# Altium PCB SelfBalancingRB.PcbDoc
Units mm, origin at the board's own origin, x right, y up, seen from the top; angles counter-clockwise.
Board outline 65.15 x 51.69 mm, 2 copper layers (Top Layer, Bottom Layer); 35 components, 29 nets, 158 pads, 28 vias.
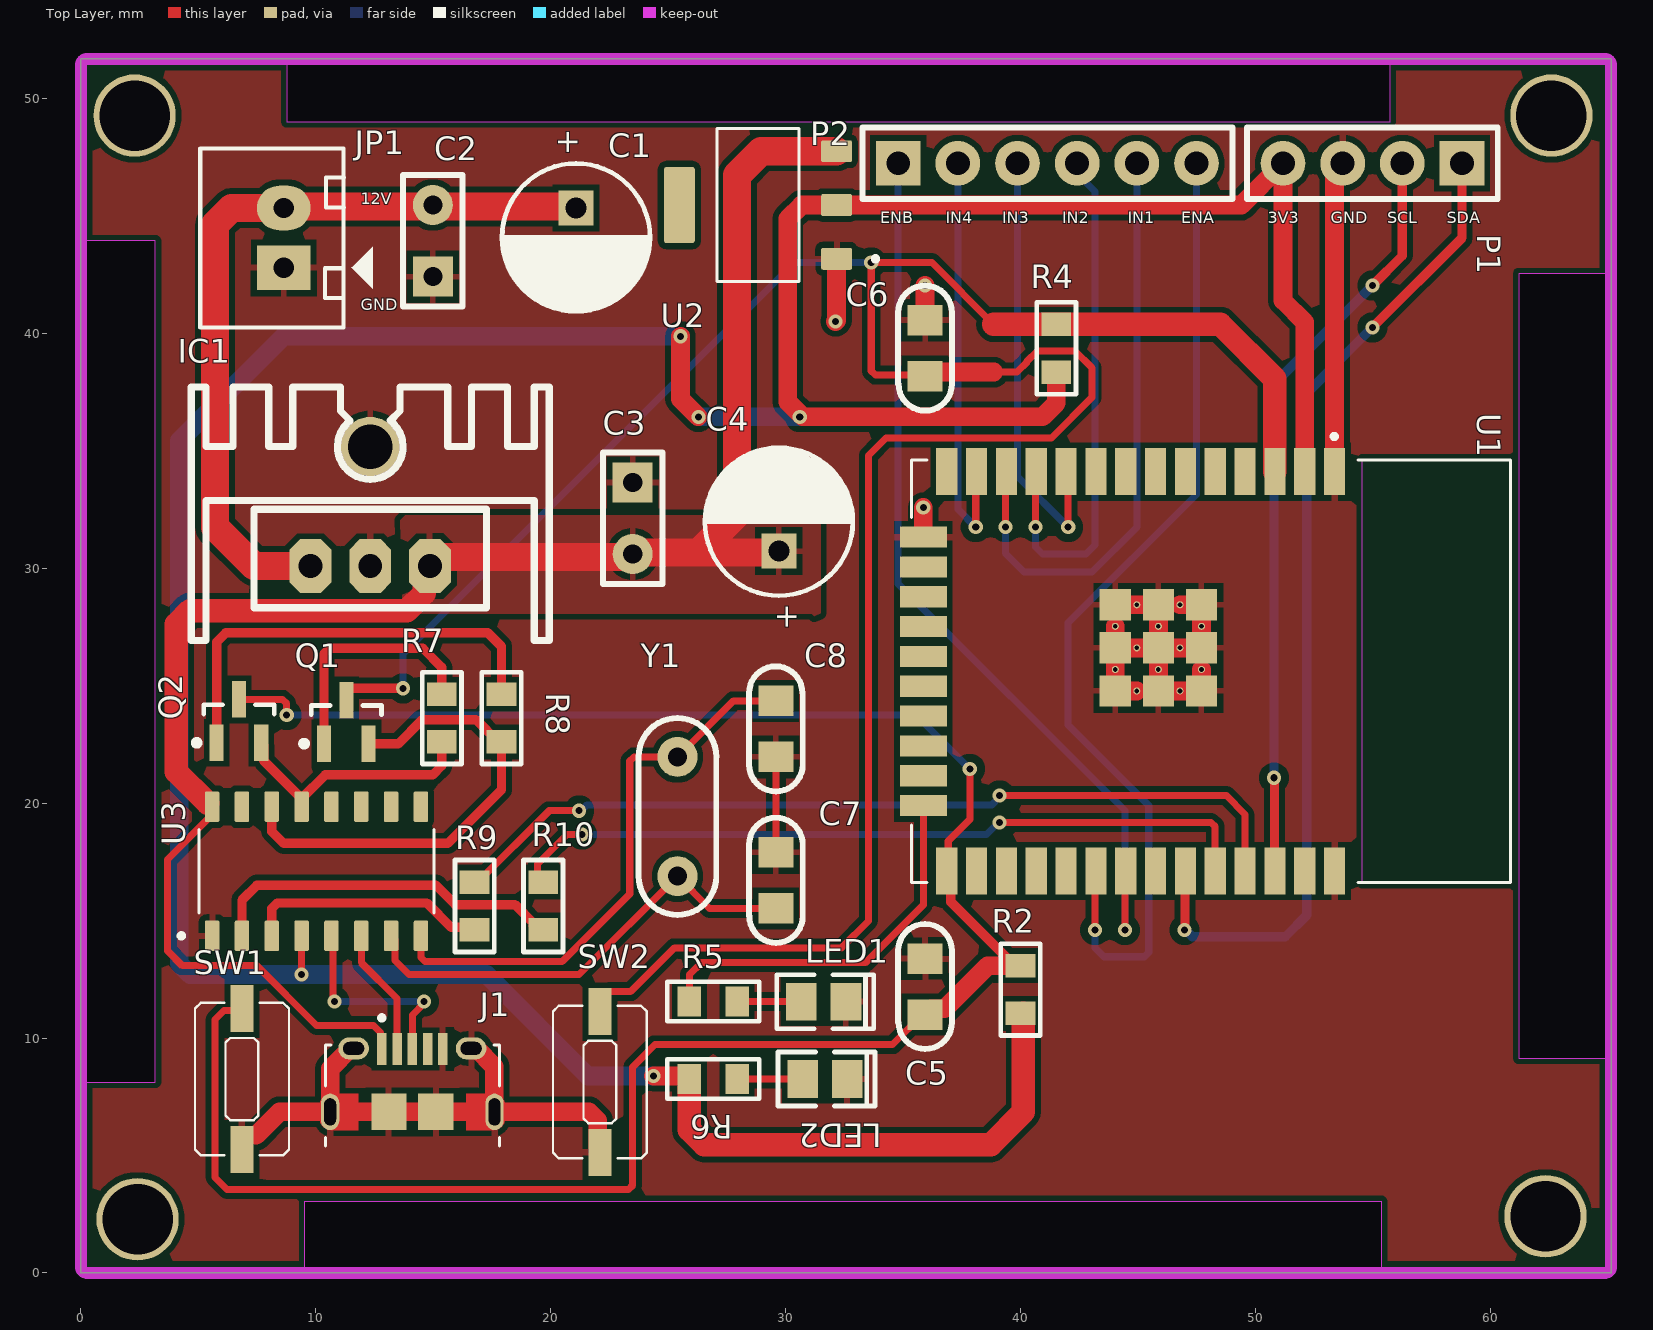
[diagram p0: Top Layer view]
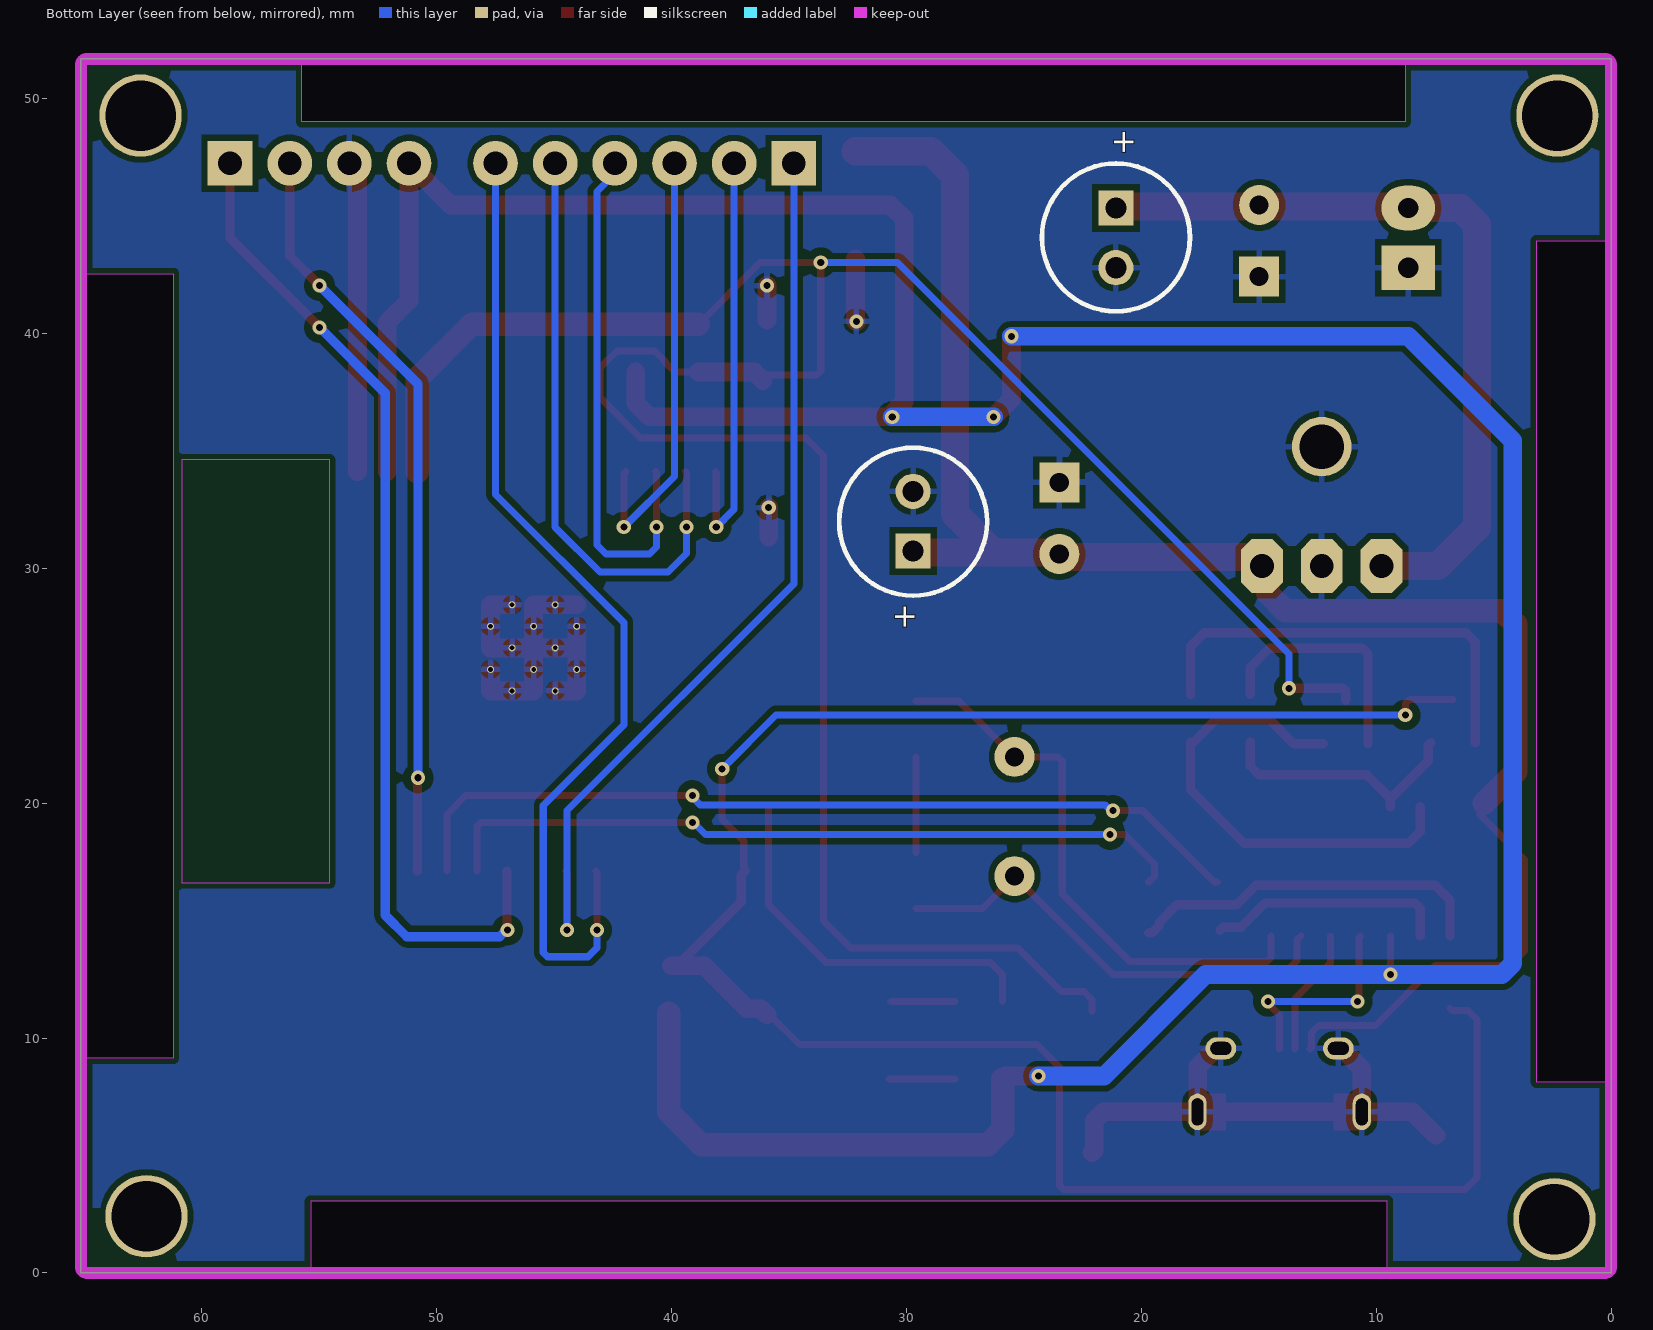
[diagram p1: Bottom Layer view, seen from below]
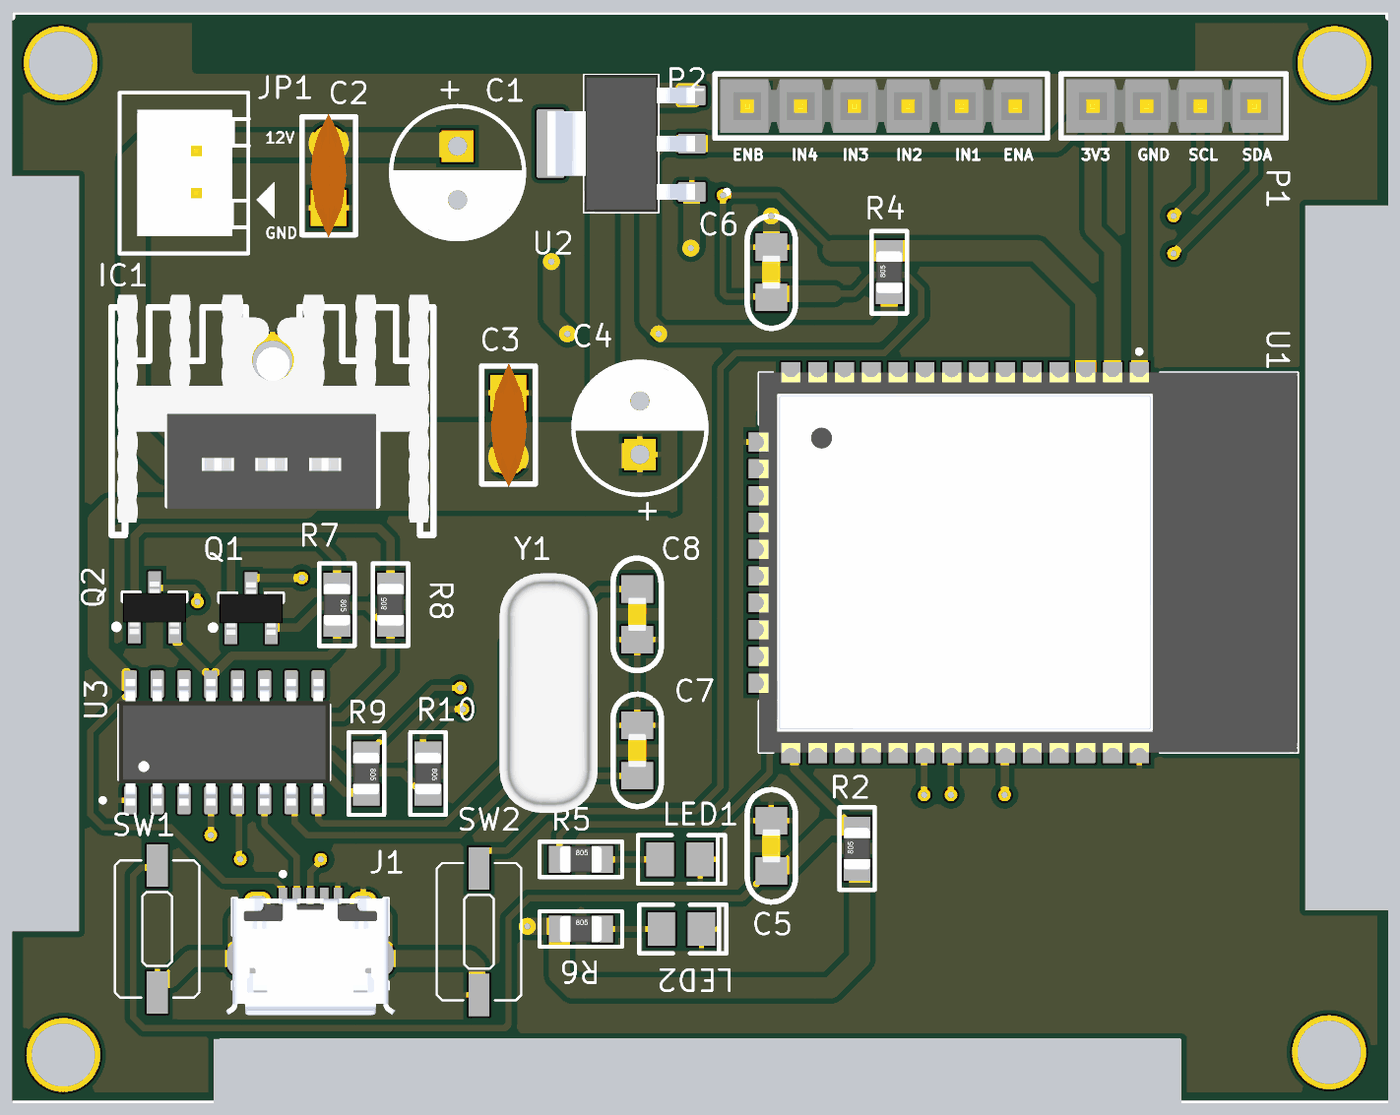
[diagram p2: 3D render of the assembled board from above, using the file's embedded part models]

## Layer stack, top to bottom
Top Solder: solder mask 0.0102, Solder Resist, Dk 3.5
Top Layer: signal copper 0.0356
Dielectric 1: dielectric 0.32, FR-4, Dk 4.8
Bottom Layer: signal copper 0.0356
Bottom Solder: solder mask 0.0102, Solder Resist, Dk 3.5

## Board outline
0,0 0,51.689 65.151,51.689 65.151,0
cut-out: 9.525,3.048 55.372,3.048 55.372,0 9.525,0
cut-out: 0,8.128 3.175,8.128 3.175,43.942 0,43.942
cut-out: 55.753,49.022 55.753,51.689 8.763,51.689 8.763,49.022
cut-out: 61.214,42.545 61.214,9.144 65.151,9.144 65.151,42.545

## Design rules (kind name [scope] priority, off if disabled: settings)
Clearance [All] p1: gap=0.254 ignorepadtopadclearanceinfootprint=TRUE except(0.5: Arc-Hole Track-Hole SMDPad-Hole THPad-Hole Via-Hole Fill-Hole Poly-Hole Region-Hole Text-Hole)
HoleSize [All] p1: absolutevalues=TRUE maxlimit=3 minlimit=0.025 maxpercent=80.000 minpercent=20.000
PolygonConnect [All] p1: connectstyle=Relief reliefconductorwidth=0.254 reliefentries=4 polygonreliefangle="90 Angle" airgapwidth=0.254
RoutingVias [All] p1: holewidth=0.3 width=0.6 viastyle="Through Hole" minholewidth=0.3 minwidth=0.6 maxholewidth=0.6 maxwidth=3
SolderMaskExpansion [All] p1: expansion=0.102 istentingtop=FALSE
Width [All] p1: maxlimit=1.5 minlimit=0.3 preferedwidth=1 toplayer_maxwidth=1.2 bottomlayer_prefwidth=0.8 minimp=50.000000 maximp=50.000000 favimp=50.000000
29 further rules are at their usual default settings.

## Components (designator, comment, footprint, x,y, rotation, side; value= is the part's Value field where it differs from the comment)
C1 "Cap Pol" "RADIAL D" 21.082,45.339 r270 top value=100uF
C2 "Cap Non-pol" "Cap Non-Pol 3mm" 14.986,43.942 r90 top value=100uF
C3 "Cap Non-pol" "Cap Non-Pol 3mm" 23.495,32.131 r270 top value=100uF
C4 "Cap Pol" "RADIAL D" 29.718,30.734 r90 top value=100uF
C5 "Cap Non-pol" C-NP-0805 35.941,12.192 r270 top value=10uF
C6 "Cap Non-pol" C-NP-0805 35.941,39.37 r270 top value=10uF
C7 "Cap Non-pol" C-NP-0805 29.591,16.713 r270 top value=22pF
C8 "Cap Non-pol" C-NP-0805 29.591,23.165 r90 top value=22pF
H? "Hole" "LO KHOAN 3MM" 2.413,2.286 r0 top
H? "Hole" "LO KHOAN 3MM" 62.357,2.413 r0 top
H? "Hole" "LO KHOAN 3MM" 2.286,49.276 r0 top
H? "Hole" "LO KHOAN 3MM" 62.611,49.276 r0 top
IC1 "LM7805" QTO-220H3 9.779,30.099 r0 top
J1 "Micro-USB" AMPHENOL_10118194-0001LF 14.113,6.858 r0 top
JP1 "INPUT" CON2 8.636,42.799 r90 top value="Connector 2"
LED1 "" LED.SMD.RED 31.623,11.557 r180 top
LED2 "" LED.SMD.RED 31.682,8.261 r180 top
P1 "MPU6050" "Header 4" 58.801,47.244 r180 top
P2 "L298_Module" "Header 6" 34.798,47.244 r0 top
Q1 "C1815" SOT23N 11.303,23.459 r90 top
Q2 "C1815" SOT23N 6.731,23.495 r90 top
R2 "RES_SMD_0805" "DIEN TRO 0805" 40.005,12.065 r270 top value=10k-0805
R4 "RES_SMD_0805" "DIEN TRO 0805" 41.529,39.37 r270 top value=10k
R5 "RES_SMD_0805" "DIEN TRO 0805" 26.924,11.557 r180 top value=470
R6 "RES_SMD_0805" "DIEN TRO 0805" 26.924,8.255 r180 top value=470
R7 "RES_SMD_0805" "DIEN TRO 0805" 15.367,23.622 r90 top value=10k
R8 "RES_SMD_0805" "DIEN TRO 0805" 17.907,23.622 r270 top value=10k
R9 "RES_SMD_0805" "DIEN TRO 0805" 16.764,15.621 r90 top value=1k
R10 "RES_SMD_0805" "DIEN TRO 0805" 19.685,15.621 r90 top value=1k
SW1 "PTS635" TactSwitches.PTS635.SMT 6.858,8.255 r90 top
SW2 "PTS635" TactSwitches.PTS635.SMT 22.098,8.128 r90 top
U1 "ESP32-WROOM-32" MODULE_ESP32-WROOM-32 48.115,25.613 r270 top
U2 "AMS1117-3.3" SOT229P700X180-4N 28.829,45.466 r180 top
U3 "CH340G" SOIC127P600X180-16N 10.033,17.101 r90 top
Y1 "XTAL" XTAL 25.4,19.431 r0 top

## Footprints (in the part's own frame and the unit in brackets; to place one, negate y for a bottom-side part, rotate by r counter-clockwise, add the part's x,y. Pads: shape width x height; smd on the part's side, far side on the other; paste and mask are expansions set on the pad)
AMPHENOL_10118194-0001LF [mm]
  rect 0.4x1.35 smd: 1(-1.3,2.675) 2(-0.65,2.675) 3(0,2.675) 4(0.65,2.675) 5(1.3,2.675)
  oval 0.775x1.55 hole 0.5 slot 1.15 at 90 deg mask+0: SH1(-3.5,0) SH4(3.5,0)
  rect 1.5x1.55 smd: SH2(1,0) SH3(-1,0)
  oval 1.3x0.95 hole 0.55 slot 0.9 at 0 deg: SH5(-2.5,2.7) SH6(2.5,2.7)
  Top Layer region: -2.3,-0.775 -3.445,-0.775 -3.471,-0.774 -3.497,-0.772 -3.523,-0.769 -3.549,-0.764 -3.574,-0.758 -3.6,-0.751 -3.624,-0.742 -3.648,-0.732 -3.672,-0.721 -3.695,-0.708 -3.717,-0.694 -3.739,-0.68 -3.76,-0.664 -3.78,-0.647 -3.799,-0.629 -3.817,-0.61 -3.834,-0.59 -3.85,-0.569 -3.864,-0.547 -3.878,-0.525 -3.891,-0.502 -3.902,-0.478 -3.912,-0.454 -3.921,-0.43 -3.928,-0.404 -3.934,-0.379 -3.939,-0.353 -3.942,-0.327 -3.944,-0.301 -3.945,-0.275 -3.945,0.275 -3.944,0.301 -3.942,0.327 -3.939,0.353 -3.934,0.379 -3.928,0.404 -3.921,0.43 -3.912,0.454 -3.902,0.478 -3.891,0.502 -3.878,0.525 -3.864,0.547 -3.85,0.569 -3.834,0.59 -3.817,0.61 -3.799,0.629 -3.78,0.647 -3.76,0.664 -3.739,0.68 -3.717,0.694 -3.695,0.708 -3.672,0.721 -3.648,0.732 -3.624,0.742 -3.6,0.751 -3.574,0.758 -3.549,0.764 -3.523,0.769 -3.497,0.772 -3.471,0.774 -3.445,0.775 -2.3,0.775
  Top Layer region: 3.471,0.774 3.497,0.772 3.523,0.769 3.549,0.764 3.574,0.758 3.6,0.751 3.624,0.742 3.648,0.732 3.672,0.721 3.695,0.708 3.717,0.694 3.739,0.68 3.76,0.664 3.78,0.647 3.799,0.629 3.817,0.61 3.834,0.59 3.85,0.569 3.864,0.547 3.878,0.525 3.891,0.502 3.902,0.478 3.912,0.454 3.921,0.43 3.928,0.404 3.934,0.379 3.939,0.353 3.942,0.327 3.944,0.301 3.945,0.275 3.945,-0.275 3.944,-0.301 3.942,-0.327 3.939,-0.353 3.934,-0.379 3.928,-0.404 3.921,-0.43 3.912,-0.454 3.902,-0.478 3.891,-0.502 3.878,-0.525 3.864,-0.547 3.85,-0.569 3.834,-0.59 3.817,-0.61 3.799,-0.629 3.78,-0.647 3.76,-0.664 3.739,-0.68 3.717,-0.694 3.695,-0.708 3.672,-0.721 3.648,-0.732 3.624,-0.742 3.6,-0.751 3.574,-0.758 3.549,-0.764 3.523,-0.769 3.497,-0.772 3.471,-0.774 3.445,-0.775 2.3,-0.775 2.3,0.775 3.445,0.775
  silkscreen extent -3.7,-1.45 3.7,4.1, body extent -4.02,-2.68 4.02,2.85, height 2.67
C-NP-0805 [mm] "Chip Capacitor; Non-polarized; Body 2.0 x 1.3 mm (LxW typ) [2012]"
  rect 1.3x1.5 smd: 1(-1.194,0) 2(1.194,0)
  silkscreen extent -2.67,-1.14 2.66,1.14, body extent -0.8,-0.43 0.8,0.43, height 0.79
"Cap Non-Pol 3mm" [mil] "Capacitor, Radial; Body 5.6 x 2.5 mm (L x W typ); Pin Spacing 3 mm (typ); Solder Pad 35mil"
  rect 67x67 hole 32: 1(-60,0)
  round 67 hole 32: 2(60,0)
  silkscreen extent -110,-50 110,50, body extent -115,-33 115,34, height 245
CON2 [mil] "CON2"
  rect 75x90 hole 34: 1(0,0)
  oval 75x90 hole 34: 2(100,0)
  silkscreen extent -100,-150 200,140, body extent -68,-70 168,107, height 236
"DIEN TRO 0805" [mm] "Chip Resistor; Body 2.0 x 1.3 mm (LxW typ)"
  rect 1x1.27 smd: 1(-1.016,0) 2(1.016,0)
  silkscreen extent -1.96,-0.84 1.96,0.84, body extent -1,-0.62 1,0.63, height 0.78
"Header 4" [mil] "Connector; Header; 4 Position; Solder Pad 35mil"
  rect 75x75 hole 40: 1(0,0)
  round 75 hole 40: 2(100,0) 3(200,0) 4(300,0)
  silkscreen extent -60,-60 360,60, body extent -50,-50 350,50, height 330
"Header 6" [mil] "Connector; Header; 6 Position; Solder Pad 35mil"
  rect 75x75 hole 40: 1(0,0)
  round 75 hole 40: 2(100,0) 3(200,0) 4(300,0) 5(400,0) 6(500,0)
  silkscreen extent -60,-60 560,60, body extent -50,-50 550,50, height 330
LED.SMD.RED [mm]
  rect 1.3x1.6 smd: 1(0.948,0.006) 2(-0.952,0.006)
  silkscreen extent -2.13,-1.14 2,1.16, body extent -1.08,-0.64 1.08,0.64, height 1.14
"LO KHOAN 3MM" [mil]
  round 138 hole 118.1: 1(0,0)
MODULE_ESP32-WROOM-32 [mm]
  rect 2x0.9 smd: 1(-8.5,5.26) 2(-8.5,3.99) 3(-8.5,2.72) 4(-8.5,1.45) 5(-8.5,0.18) 6(-8.5,-1.09) 7(-8.5,-2.36) 8(-8.5,-3.63) 9(-8.5,-4.9) 10(-8.5,-6.17) 11(-8.5,-7.44) 12(-8.5,-8.71) 13(-8.5,-9.98) 14(-8.5,-11.25) 25(8.5,-11.25) 26(8.5,-9.98) 27(8.5,-8.71) 28(8.5,-7.44) 29(8.5,-6.17) 30(8.5,-4.9) 31(8.5,-3.63) 32(8.5,-2.36) 33(8.5,-1.09) 34(8.5,0.18) 35(8.5,1.45) 36(8.5,2.72) 37(8.5,3.99) 38(8.5,5.26)
  rect 0.9x2 smd: 15(-5.715,-12.25) 16(-4.445,-12.25) 17(-3.175,-12.25) 18(-1.905,-12.25) 19(-0.635,-12.25) 20(0.635,-12.25) 21(1.905,-12.25) 22(3.175,-12.25) 23(4.445,-12.25) 24(5.715,-12.25)
  rect 1.33x1.33 smd: 39_1(-2.835,-0.405) 39_2(-1,-0.405) 39_3(0.835,-0.405) 39_4(-2.835,-2.24) 39_5(-1,-2.24) 39_6(0.835,-2.24) 39_7(-2.835,-4.075) 39_8(-1,-4.075) 39_9(0.835,-4.075)
  round 0.3 hole 0.2: 39_10(-1.917,-0.405) 39_11(-0.082,-0.405) 39_12(-2.835,-1.322) 39_13(-1,-1.322) 39_14(0.835,-1.322) 39_15(-1.917,-2.24) 39_16(-0.082,-2.24) 39_17(-2.835,-3.157) 39_18(-1,-3.157) 39_19(0.835,-3.157) 39_20(-1.917,-4.075) 39_21(-0.082,-4.075)
  Keep-Out Layer region: 9,6.45 -9,6.45 -9,12.75 9,12.75
  Keep-Out Layer region: 9,6.45 -9,6.45 -9,12.75 9,12.75
  silkscreen extent -10.1,-12.75 9,12.75, body extent -9,-12.75 9,12.75, height 3.2
QTO-220H3 [mil] "TO-220 1-2-3"
  oct 70x90 hole 40: 1(0,0) 2(100,0) 3(200,0)
  round 100 hole 75: 2(100,200)
  silkscreen extent -200,-125 400,300, body extent -190,-102 392,323, height 984
"RADIAL D" [mm] "Capacitor, Electrolytic, Radial; Body 6.3 x 9.8 mm (Dia.xH typ); Pin Spacing 2.5 mm (typ)"
  rect 1.5x1.5 hole 0.9: 1(0,0)
  round 1.5 hole 0.9: 2(2.54,0)
  silkscreen extent -1.9,-3.15 4.4,3.15
SOIC127P600X180-16N [mm]
  rrect25% 1.31x0.62 smd: 1(-2.75,4.445) 2(-2.75,3.175) 3(-2.75,1.905) 4(-2.75,0.635) 5(-2.75,-0.635) 6(-2.75,-1.905) 7(-2.75,-3.175) 8(-2.75,-4.445) 9(2.75,-4.445) 10(2.75,-3.175) 11(2.75,-1.905) 12(2.75,-0.635) 13(2.75,0.635) 14(2.75,1.905) 15(2.75,3.175) 16(2.75,4.445)
  silkscreen extent -2.85,-5 1.78,5.85, body extent -3,-5 3,5, height 1.8
SOT23N [mm] "SOT23, 3-Leads, Body 3.0x2.6mm (max), Pitch 0.95mm, IPC Medium Density"
  rect 1.55x0.6 smd: 1(-0.925,0.95) 2(-0.925,-0.95) 3(0.925,0)
  silkscreen extent -1.05,-1.5 0.7,1.92, body extent -1.27,-1.5 1.23,1.5, height 1.05
SOT229P700X180-4N [mm]
  rrect15% 1.31x0.93 smd: 1(-3.345,2.29) 2(-3.345,0) 3(-3.345,-2.29)
  rrect15% 1.31x3.24 smd: 4(3.345,0)
  silkscreen extent -5.1,-3.25 1.75,3.25, body extent -3.5,-3.25 3.5,3.25, height 1.8
TactSwitches.PTS635.SMT [mil] "3,5 mm Tact Switches, PTS635 Series"
  rect 79x39 smd: 1(-118,0) 2(118,0)
  silkscreen extent -128,-79 128,79, body extent -135,-70 135,70, height 100
XTAL [mil] "Crystal, Thru-Hole; 2 Leads; Body 3.1 x 8.2 mm (Dia.xH); Solder pad 35mil"
  round 67 hole 32: 1(0,100) 2(0,-100)
  silkscreen extent -65,-165 65,165, body extent -92,-223 92,223, height 139

## Part data
C1 C4: "Polarized Capacitor", LatestRevisionDate=17-Jul-2002, LatestRevisionNote="Re-released for DXP Platform.", PackageReference=POLAR0.8, Published=8-Jun-2000, Publisher="Altium Limited"
C2 C3 C5 C6 C7 C8: "Non-polarized Capacitor", LatestRevisionDate=17-Jul-2002, LatestRevisionNote="Re-released for DXP Platform.", PackageReference=RAD-0.3, Published=8-Jun-2000, Publisher="Altium Limited"
H? H? H? H?: "Hole 3mm"
IC1: library part LM78xx_1, "On ap +, from + 5 to + 24VDC"
J1: library part 10118194-0001LF, "Micro USB, Input Output Connectors, B TYPE RECEPTACLE with flange", Package=None, Check_prices=https://www.snapeda.com/parts/10118194-0001LF/Amphenol+FCI/view-part/?ref=eda, MF="Amphenol ICC", MP=10118194-0001LF, SnapEDA_Link=https://www.snapeda.com/parts/10118194-0001LF/Amphenol+FCI/view-part/?ref=snap
JP1: library part Con2, "Connector 2"
LED1 LED2: library part LED_1, "Typical GaAs SMD LED", Color=RED, Manufacturer="Lite-On Inc", ComponentLink1Description="Digikey Part Link", ComponentLink2Description="Open Datasheet", ComponentLink2URL=H:\LIBRARY\LIBRARY.Datasheet\, Published=13-April-2009, Publisher="Hoang Nguyen", Type="Cong ty RP", Vendor=Digikey
P1: library part "Header 4", "Header, 4-Pin", LatestRevisionDate=17-Jul-2002, LatestRevisionNote="Re-released for DXP Platform.", Publisher="Altium Limited"
P2: library part "Header 6", "Header, 6-Pin", LatestRevisionDate=17-Jul-2002, LatestRevisionNote="Re-released for DXP Platform.", Publisher="Altium Limited"
Q1 Q2: "Q2SC1815", PSpiceTemplate="Q^@REFDES %c %b %e @MODEL", COMPONENT=2SC1815, ComponentLink1Description="Digikey Part Link", ComponentLink2Description="Open Datasheet", ComponentLink2URL=H:\LIBRARY\LIBRARY.Datasheet\, Price=500VND, Published=13-April-2009, Publisher="Hoang Nguyen", Vendor=Digikey
R2 R4 R5 R6 R7 R8 R9 R10: "RES_0805", LatestRevisionDate=17-Jul-2002, LatestRevisionNote="Re-released for DXP Platform.", PackageReference=AXIAL-0.4, Published=8-Jun-2000, Publisher="Altium Limited"
SW1 SW2: library part "SW TACT MOM SPST", "SWITCH TACT MOM SPST SMD", Manufacturer="C&K Components", Manufacturer P/N="PTS635SL25SMTR LFS", ComponentLink1Description="Digikey Part Link", ComponentLink1URL=http://search.digikey.com/scripts/DkSearch/dksus.dll?Detail&name=CKN1573CT-ND, ComponentLink2Description="Open Datasheet", ComponentLink2URL=H:\LIBRARY\LIBRARY.Datasheet\SBLCDA4_Specification.pdf, Published=13-April-2009, Publisher="Hoang Nguyen", Vendor=Digikey, Vendor P/N=CKN9119CT-ND
U1: "Bluetooth, WiFi 802.11b/g/n, Bluetooth v4.2 +EDR, Class 1, 2 and 3 Transceiver Module 2.4GHz ~ 2.5GHz Antenna Not Included, U.FL Surface Mount", Package="Module Espressif Systems", Availability="In Stock", Check_prices=https://www.snapeda.com/parts/ESP32-WROOM-32/Espressif+Systems/view-part/?ref=eda, MF="Espressif Systems", MP=ESP32-WROOM-32, Price=None, Purchase-URL=https://pricing.snapeda.com/search/part/ESP32-WROOM-32/?ref=eda, SnapEDA_Link=https://www.snapeda.com/parts/ESP32-WROOM-32/Espressif+Systems/view-part/?ref=snap
U2: "Sot223/Pkg 1-Amp 3.3-Volt Low Drop Out Voltage Regulatator", Package="SOT-223 Seeed Technology", Availability="Not in stock", Check_prices=https://www.snapeda.com/parts/AMS1117-3.3/Advanced+Monolithic+Systems/view-part/?ref=eda, MF="Advanced Monolithic Systems", MP=AMS1117-3.3, Price=None, SnapEDA_Link=https://www.snapeda.com/parts/AMS1117-3.3/Advanced+Monolithic+Systems/view-part/?ref=snap
U3: "USB Interface Integrated Circuit", Package=None, Availability="Not in stock", Check_prices=https://www.snapeda.com/parts/Ch340G/WCH/view-part/?ref=eda, MF=WCH, MP=Ch340G, Price=None, SnapEDA_Link=https://www.snapeda.com/parts/Ch340G/WCH/view-part/?ref=snap
Y1: "Crystal Oscillator", LatestRevisionDate=17-Jul-2002, LatestRevisionNote="Re-released for DXP Platform.", PackageReference=R38, Published=8-Jun-2000, Publisher="Altium Limited"

## Via types
v1: diameter 0.6, hole 0.3, Top Layer to Bottom Layer, 28 vias

## Nets (pads, with @x,y where several pads share a name; then routed paths per layer and width w, separated by ;. In a path a pad name is that pad's centre, name@x,y a point inside that pad or via, vN(x,y) a via of type N, cw(c..) or ccw(c..) an arc to the next point about the centre after c; other vN are vias at no path point)
3V3: P1.4 R2.2 R4.2 R6.2 U1.2 U2.2 U3.4 | length 156.9
  Top Layer w0.3: v1(9.398,12.7) U3.4
  Top Layer w0.8: v1(24.384,8.382) 25.808,8.382 25.908,8.282 R6.2 ; v1(25.527,39.878) 25.527,37.211 v1(26.289,36.449) ; v1@30.67,36.512 30.099,37.084 30.099,44.88 30.685,45.466 U2.2 49.403,45.466 P1.4 51.181,41.402 52.105,40.478 U1.2 ; v1@30.734,36.449 40.943,36.449 41.529,37.035 R4.2
  Top Layer w1: R6.2 25.908,6.096 26.543,5.461 38.735,5.461 40.132,6.858 R2.2@40.132,11.049
  Bottom Layer w0.8: v1(24.384,8.382) 21.59,8.382 17.272,12.7 v1(9.398,12.7) 4.66,12.7 4.191,13.169 4.191,35.433 8.636,39.878 v1(25.527,39.878) ; v1(26.289,36.449) v1(30.607,36.449)
+5: C3.2 C4.1 IC1.3 J1.1 U2.3 U3.16 | length 75
  Top Layer w0.3: U3.16 5.588,19.506 3.683,17.601 3.683,13.716 4.318,13.081 7.493,13.081 10.033,10.541 12.46,10.541 12.763,10.238 12.763,9.583 J1.1
  Top Layer w1: U3.16@5.398,20.006 4.064,21.34 4.064,27.616 4.65,28.202 13.884,28.202 14.622,28.939 14.622,29.862 IC1.3
  Top Layer w1.2: IC1.3 14.859,30.191 15.148,30.48 23.232,30.48 23.263,30.511 C3.2@23.283,30.491 ; C3.2 23.558,30.67 26.289,30.67 ; C4.1 29.654,30.67 26.289,30.67 ; U2.3 28.96,47.756 27.94,46.736 27.94,32.322 26.289,30.67
D+: J1.3 U3.5 | length 8.9
  Top Layer w0.3: U3.5 10.738,14.281 10.738,11.614 v1(10.795,11.557) ; J1.3 14.113,10.988 14.605,11.48 v1(14.605,11.557)
  Bottom Layer w0.3: v1(10.795,11.557) v1(14.605,11.557)
D-: J1.2 U3.6 | length 5.4
  Top Layer w0.3: U3.6 11.938,13.208 13.463,11.683 J1.2
DTR: Q2.2 R7.1 U3.13 | length 11
  Top Layer w0.4: Q2.2 7.781,22.47 7.781,21.813 U3.13@9.398,20.196 ; U3.13 U3.13@9.398,20.196 ; R7.1 15.367,21.59 14.986,21.209 10.411,21.209 U3.13@9.398,20.196
EN: C6.2 Q1.3 R4.1 SW2.2 U1.3 | length 114.1
  Top Layer w0.3: SW2.2 22.098,11.633 22.443,11.979 23.409,11.979 25.273,13.843 32.385,13.843 33.528,14.986 33.528,34.798 34.275,35.545 41.318,35.545 43.053,37.28 43.053,38.536 42.331,39.258 40.727,39.258 40.291,38.822 40.291,38.79 39.855,38.354 38.862,38.354 ; C6.2 35.89,38.227 33.826,38.227 33.651,38.403 v1(33.651,43.015) 36.233,43.015 38.862,40.386
  Top Layer w0.4: Q1.3 11.303,24.792 11.403,24.892 v1(13.716,24.892)
  Top Layer w0.8: C6.2@36.118,37.999 36.473,38.354 38.862,38.354
  Top Layer w1: 38.862,40.386 R4.1 48.514,40.386 50.835,38.065 U1.3
  Bottom Layer w0.3: v1(13.716,24.892) 13.716,26.348 30.383,43.015 v1(33.651,43.015)
ENA: P2.6 U1.30 | length 43.1
  Top Layer w0.3: v1(43.18,14.605) 43.18,17.077 U1.30
  Bottom Layer w0.3: v1(43.18,14.605) 43.18,13.843 43.561,13.462 45.29,13.462 45.466,13.638 45.466,19.903 42.037,23.332 42.037,27.686 47.498,33.147 P2.6
ENB: P2.1 U1.31 | length 39.2
  Top Layer w0.3: v1(44.45,14.605) 44.45,17.077 U1.31
  Bottom Layer w0.3: P2.1 34.798,29.337 44.45,19.685 v1(44.45,14.605)
ESP_SCL: P1.2 U1.36 | length 32.4
  Top Layer w0.4: v1(50.8,21.082) 50.818,21.064 50.818,17.131 U1.36 ; v1(54.991,42.037) 56.261,43.307 P1.2
  Bottom Layer w0.4: v1(50.8,21.082) 50.8,37.846 v1(54.991,42.037)
ESP_SDA: P1.1 U1.33 | length 43
  Top Layer w0.4: v1(46.99,14.605) 47.008,14.623 47.008,17.095 U1.33 ; v1(54.991,40.259) 58.801,44.069 P1.1
  Bottom Layer w0.4: v1(46.99,14.605) 47.036,14.605 47.324,14.317 51.274,14.317 52.197,15.24 52.197,37.465 v1(54.991,40.259)
GND: C1.2 C2.1 C3.1 C4.2 C5.1 C6.1 C7.1 C8.1 IC1.2 J1.5 J1.SH1 J1.SH2 J1.SH3 J1.SH4 J1.SH5 J1.SH6 JP1.1 LED1.2 LED2.2 P1.3 SW1.1 SW2.1 U1.1 U1.15 U1.38 U1.39_1 U1.39_2 U1.39_3 U1.39_4 U1.39_5 U1.39_6 U1.39_7 U1.39_8 U1.39_9 U1.39_10 U1.39_11 U1.39_12 U1.39_13 U1.39_14 U1.39_15 U1.39_16 U1.39_17 U1.39_18 U1.39_19 U1.39_20 U1.39_21 U2.1 U3.1 | length 64
  Top Layer w0.3: C7.1 C8.1
  Top Layer w0.8: 7.461,5.861 8.458,6.858 J1.SH1 ; J1.SH5 11.479,9.558 10.613,8.692 J1.SH1 ; J1.SH6 16.829,9.558 17.6,8.786 17.6,6.871 J1.SH4 ; SW2.1 22.003,5.226 22.003,6.485 21.629,6.858 J1.SH4 ; v1(32.131,40.513) 32.174,40.556 U2.1 ; U1.15 v1(35.865,32.588) ; C6.1 v1(35.941,42.037) ; U1.39_20 U1.39_8 ; U1.39_7 U1.39_17 U1.39_4 U1.39_15 U1.39_5 ; U1.39_19 U1.39_9 U1.39_21 U1.39_8 ; U1.39_12 U1.39_1 U1.39_10 U1.39_2 U1.39_13 U1.39_5 ; U1.39_11 U1.39_3 U1.39_14 U1.39_6 U1.39_16 U1.39_5 ; U1.1 53.375,46.599 53.721,46.945 P1.3 ; J1.SH1 J1.SH3 J1.SH2 J1.SH4 ; U1.39_8 U1.39_18 U1.39_5
In1: P2.5 U1.12 | length 25.7
  Top Layer w0.3: v1(39.37,31.75) 39.37,34.078 U1.12
  Bottom Layer w0.3: v1(39.37,31.75) 39.37,30.628 40.153,29.845 43.053,29.845 44.958,31.75 P2.5
In2: P2.4 U1.11 | length 22.6
  Top Layer w0.3: v1(40.64,31.75) 40.64,34.078 U1.11
  Bottom Layer w0.3: v1(40.64,31.75) 40.64,30.91 40.943,30.607 42.799,30.607 43.18,30.988 43.18,46.048 42.418,46.81 P2.4
In3: P2.3 U1.10 | length 18.8
  Top Layer w0.3: U1.10 42.037,34.021 v1(42.037,31.75)
  Bottom Layer w0.3: P2.3 39.878,33.909 v1(42.037,31.75)
In4: P2.2 U1.13 | length 18.2
  Top Layer w0.3: v1(38.1,31.75) 38.1,34.078 U1.13
  Bottom Layer w0.3: P2.2 37.338,32.512 v1(38.1,31.75)
IO0: C5.2 Q2.3 R2.1 SW1.2 U1.25 | length 92
  Top Layer w0.3: Q2.3 8.587,24.42 8.763,24.244 v1(8.763,23.749) ; SW1.2 6.774,11.168 6.088,11.168 5.715,10.795 5.715,4.064 6.223,3.556 23.319,3.556 23.495,3.732 23.495,8.763 24.45,9.718 34.561,9.718 35.841,10.998 C5.2 ; U1.25 36.929,17.177 36.929,18.387 37.846,19.304 v1(37.846,21.463)
  Top Layer w0.4: U1.25 37.042,16.937 37.042,15.79 R2.1@39.703,13.129
  Top Layer w0.8: C5.2 36.191,11.248 36.775,11.248 38.608,13.081 R2.1
  Bottom Layer w0.3: v1(8.763,23.749) 35.56,23.749 v1(37.846,21.463)
IO2: R5.2 U1.24 | length 16.6
  Top Layer w0.3: R5.2 25.908,12.7 26.416,13.208 33.401,13.208 35.865,15.672 U1.24
NetC1_1: C1.1 C2.2 IC1.1 JP1.2 | length 33.4
  Top Layer w1.2: IC1.1 7.366,30.099 5.715,31.75 5.715,44.636 6.418,45.339 JP1.2 8.7,45.402 14.922,45.402 C2.2 15.05,45.402 21.018,45.402 C1.1
NetC7_2: C7.2 U3.7 Y1.2 | length 19.9
  Top Layer w0.3: U3.7 13.368,14.191 13.368,13.302 13.97,12.7 21.209,12.7 Y1.2 26.772,15.519 C7.2
NetC8_2: C8.2 U3.8 Y1.1 | length 24
  Top Layer w0.3: U3.8 14.478,13.43 14.654,13.254 20.493,13.254 23.368,16.129 23.368,21.795 23.544,21.971 Y1.1 27.788,24.359 C8.2
NetLED1_1: LED1.1 R5.1 | length 2.7
  Top Layer w0.3: R5.1 30.67,11.557 LED1.1
NetLED2_1: LED2.1 R6.1 | length 2.8
  Top Layer w0.3: R6.1 LED2.1
NetQ1_1: Q1.1 R7.2 | length 10.4
  Top Layer w0.4: Q1.1 10.353,26.36 10.587,26.594 14.554,26.594 15.367,25.781 R7.2
NetQ2_1: Q2.1 R8.1 | length 18.8
  Top Layer w0.4: Q2.1 5.781,26.863 6.166,27.248 17.329,27.248 17.907,26.67 R8.1
NetR9_1: R9.1 U3.3 | length 10.2
  Top Layer w0.4: U3.3 8.128,15.514 8.362,15.748 14.732,15.748 15.763,14.717 16.517,14.717 R9.1@16.637,14.597
NetR10_1: R10.1 U3.2 | length 15.5
  Top Layer w0.4: U3.2 6.858,15.875 7.493,16.51 15.114,16.51 15.941,15.683 18.48,15.683 19.25,14.913 19.25,14.778 19.55,14.478 R10.1@19.685,14.478
RTS: Q1.2 R8.2 U3.14 | length 20.5
  Top Layer w0.4: U3.14 8.128,18.796 8.636,18.288 15.621,18.288 17.907,20.574 R8.2 17.772,22.606 16.818,23.56 14.544,23.56 13.518,22.534 Q1.2
RXD0: R10.2 U1.34 | length 32.4
  Top Layer w0.3: R10.2 19.443,16.879 19.443,17.411 20.701,18.669 v1(21.336,18.669) ; v1(39.116,19.177) 48.12,19.177 48.295,19.001 U1.34
  Bottom Layer w0.3: v1(21.336,18.669) 38.563,18.669 39.071,19.177 v1(39.116,19.177)
TXD0: R9.2 U1.35 | length 37.1
  Top Layer w0.3: R9.2 16.899,16.637 19.941,19.679 v1(21.215,19.679) ; v1(39.116,20.32) 48.768,20.32 49.565,19.523 U1.35
  Bottom Layer w0.3: v1(21.215,19.679) 21.296,19.679 21.548,19.931 38.79,19.931 39.116,20.257 v1(39.116,20.32)
pads on no net: H?.1 J1.4 U1.4 U1.5 U1.6 U1.7 U1.8 U1.9 U1.14 U1.16 U1.17 U1.18 U1.19 U1.20 U1.21 U1.22 U1.23 U1.26 U1.27 U1.28 U1.29 U1.32 U1.37 U2.4 U3.9 U3.10 U3.11 U3.12 U3.15

## Polygon pours and split planes (outlines as drawn)
GND on Top Layer "NONET_L-01_P-001" (solid, pour order 3): 0.127,51.562 0.254,51.689 65.151,51.689 65.151,0 0,0
+5 on Top Layer "+5_L01_P000" (solid, pour order 0): 13.589,32.258 31.496,32.258 31.496,27.686 31.115,28.067 13.716,28.067
GND on Bottom Layer "NONET_L-01_P-001" (solid, pour order 4): 0.254,51.562 65.151,51.562 65.151,0.127 0.127,0.127

## Keep-outs
Keep-Out Layer:
  lines w0.5: 0,0.254 ccw(c0.254,0.254) 0.254,0 64.897,0 ccw(c64.897,0.254) 65.151,0.254 65.151,51.435 ccw(c64.897,51.435) 64.897,51.689 0.254,51.689 ccw(c0.254,51.435) 0,51.435 0,0.254

## Silkscreen, mask and mechanical layers (free items; w line width, h text height)
Top Overlay:
  text "12V" at 11.911,45.502 h0.5
  text "ENB" at 34.029,44.697 h0.5
  text "IN4" at 36.823,44.697 h0.5
  text "IN3" at 39.236,44.697 h0.5
  text "IN2" at 41.776,44.697 h0.5
  text "IN1" at 44.57,44.697 h0.5
  text "ENA" at 46.856,44.697 h0.5
  text "3V3" at 50.539,44.697 h0.5
  text "GND" at 53.206,44.697 h0.5
  text "SCL" at 55.619,44.697 h0.5
  text "SDA" at 58.159,44.697 h0.5
  text "GND" at 11.911,40.994 h0.5

## Dimensions
65.405,0 to 64.897,51.689 on Top Overlay
0,51.435 to 65.151,51.435 on Top Overlay

## Text inside footprints (layer, text, board x,y; h text height)
C1: Top Overlay "+" at 20.332,48.714 h1 r270; Bottom Overlay "+" at 20.332,48.714 h1 r270
C4: Top Overlay "+" at 30.468,27.359 h1 r90; Bottom Overlay "+" at 30.468,27.359 h1 r90
U1: Mechanical 13 "ANTENNA" at 57.115,31.613 h1 r270